# Altium PCB PCB1.PcbDoc (part 2 of 2)
Units mil, origin at the board's own origin, x right, y up, seen from the top; angles counter-clockwise.
Board outline 3937.01 x 3937.01 mil, 2 copper layers (Top Layer, Bottom Layer); 147 components, 119 nets, 531 pads, 24 vias.
Unrouted connection lines stored in the file: 277.
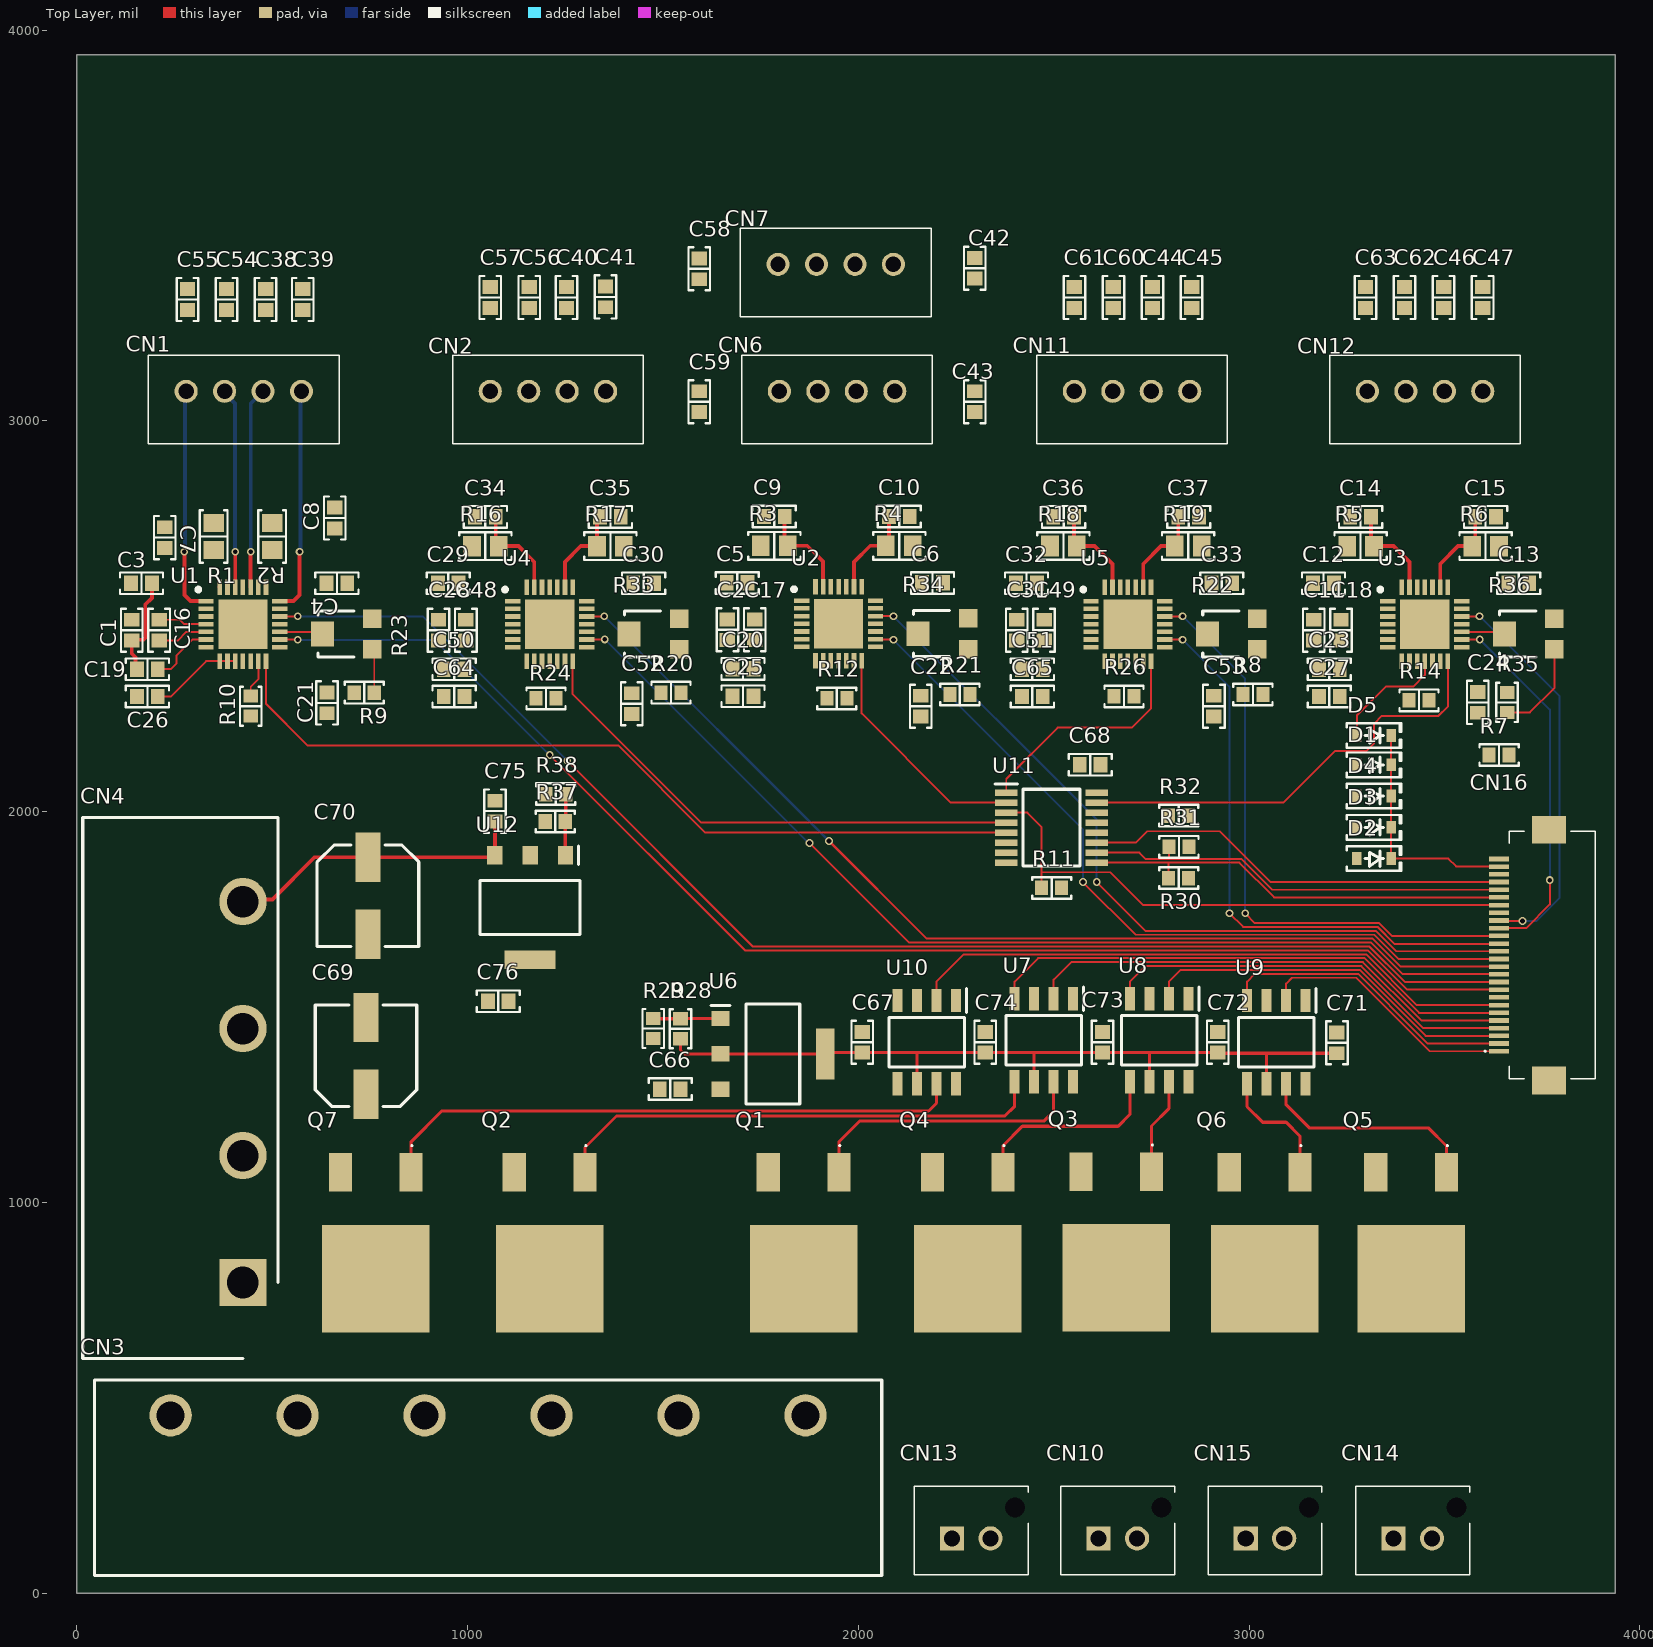
[diagram p0: Top Layer view]

## Via types
v1: diameter 19.68, hole 11.81, Top Layer to Bottom Layer, 24 vias

## Nets (pads, with @x,y where several pads share a name; then routed paths per layer and width w, separated by ;. In a path a pad name is that pad's centre, name@x,y a point inside that pad or via, vN(x,y) a via of type N, cw(c..) or ccw(c..) an arc to the next point about the centre after c; other vN are vias at no path point) (continued)
NetD5_1: (continued)
  Top Layer w5: D5.1 3276.2,2246.2 3350,2320 3420,2320 3450,2350 U3.11
NetR8_2: R8.2 R22.1
NetR9_2: R9.2 R23.1 | length 112.6
  Top Layer w5: R23.1 761.1,2410.59 R9.2
NetR10_2: R10.2 U1.13 | length 98.8
  Top Layer w5: R10.2 445,2320 464.37,2339.37 U1.13 U1.13@465,2384.88
NetR12_2: R12.2 U2.13
NetR14_2: R14.2 U3.13
NetR20_2: R20.2 R33.1
NetR21_2: R21.2 R34.1
NetR22_2: R22.2 U5.17
NetR23_2: R23.2 U1.17 | length 111.3
  Top Layer w5: U1.17 622.8,2460.32 R23.2
NetR24_2: R24.2 U4.13
NetR26_2: R26.2 U5.13
NetR28_1: R28.1 R29.2 U6.1 | length 172.8
  Top Layer w5: R29.2 R29.2@1475.59,1470 ; R28.1 R28.1@1545.55,1470.55
  Top Layer w8: R29.2@1475.59,1470 R28.1 ; R28.1@1545.55,1470.55 U6.1
NetR33_2: R33.2 U4.17
NetR34_2: R34.2 U2.17
NetR35_2: R35.2 R36.1 | length 245.6
  Top Layer w5: R35.2 3719.09,2254.09 3781.38,2316.38 R36.1
NetR36_2: R36.2 U3.17 | length 111.3
  Top Layer w5: U3.17 3647.8,2460.32 R36.2
NetR37_1: R37.1 R38.2 U12.1 | length 156.9
  Top Layer w8: U12.1 1250,1889.41 R37.1 1251.18,1976.18 R38.2
NZLFG: Q5.1 U9.7 | length 575.3
  Top Layer w8: U9.7 3095,1250 3155,1190 3460,1190 3505.55,1144.45 Q5.1
OA1: C38.2 CN1.2 U1.24 | length 514.7
  Top Layer w10: U1.24 444.68,2664.68 v1(445,2665)
  Bottom Layer w10: v1(445,2665) 445,3044.57 CN1.2
OA2: C39.2 CN1.1 U1.21 | length 580.1
  Top Layer w10: U1.21 554.06,2539.06 570,2555 v1(570,2665)
  Bottom Layer w10: v1(570,2665) 571.85,2666.85 571.85,3073 CN1.1
OA3: C40.2 CN2.2 U4.24
OA4: C41.2 CN2.1 U4.21
OA5: C42.2 CN6.2 CN7.2 U2.24
OA6: C43.2 CN6.1 CN7.1 U2.21
OA7: C44.2 CN11.2 U5.24
OA8: C45.2 CN11.1 U5.21
OA9: C46.2 CN12.2 U3.24
OA10: C47.2 CN12.1 U3.21
OB1: C54.2 CN1.3 U1.26 | length 510.8
  Top Layer w10: v1(405,2665) 405.32,2664.68 U1.26
  Bottom Layer w10: CN1.3@383,3076 383,3067 405,3045 v1(405,2665)
OB2: C55.2 CN1.4 U1.1 | length 585.3
  Top Layer w10: v1(275,2665) 275,2554.56 290.5,2539.06 U1.1
  Bottom Layer w10: v1(275,2665) 276.85,2666.85 276.85,3073.28 CN1.4
OB3: C56.2 CN2.3 U4.26
OB4: C57.2 CN2.4 U4.1
OB5: C58.2 CN6.3 CN7.3 U2.26
OB6: C59.2 CN6.4 CN7.4 U2.1
OB7: C60.2 CN11.3 U5.26
OB8: C61.2 CN11.4 U5.1
OB9: C62.2 CN12.3 U3.26
OB10: C63.2 CN12.4 U3.1
STEP1: CN16.9 U1.16 | length 3491.8
  Top Layer w5: U1.16 519.8,2440.31 564.69,2440.31 v1(565,2440) ; v1(1210,2145) 1710,1645 3303.99,1645 3404.62,1544.37 CN16.9
  Bottom Layer w5: v1(565,2440) 915,2440 v1(1210,2145)
STEP2: CN16.11 U4.16 | length 2690.7
  Top Layer w5: U4.16 1350.81,2440.63 v1(1351.09,2440.91) ; v1(1875,1920) 2130,1665 3312.28,1665 3392.91,1584.37 3639.37,1584.37 CN16.11
  Bottom Layer w5: v1(1351.09,2440.91) 1872.01,1920 v1(1875,1920)
STEP3: CN16.13 U2.16 | length 2014.1
  Top Layer w5: U2.16 2044.74,2440.77 2089.23,2440.77 v1(2090,2440) ; v1(2575,1820) 2710,1685 3320.56,1685 3382.45,1623.11 CN16.13
  Bottom Layer w5: v1(2090,2440) 2575,1955 v1(2575,1820)
STEP4: CN16.15 U5.16 | length 1518
  Top Layer w5: U5.16 2784.8,2440.31 2829.69,2440.31 v1(2830,2440) ; v1(2950,1740) 2985,1705 3328.85,1705 3371.92,1661.92 3639.44,1661.92 CN16.15
  Bottom Layer w5: v1(2830,2440) 2950,2320 v1(2950,1740)
STEP5: CN16.17 U3.16 | length 953.7
  Top Layer w5: U3.16 3590.47,2440.63 v1(3590.56,2440.72) ; CN16.17 3684.96,1701.85 3709.16,1701.85 3770,1762.69 v1(3770,1825)
  Bottom Layer w5: v1(3590.56,2440.72) 3770,2261.28 v1(3770,1825)
UART: CN16.20 R11.1 U11.3 | length 1467
  Top Layer w5: U11.3 2432.64,1997.36 2469.41,1960.59 2469.41,1845 ; R11.1 2469.41,1845 ; CN16.20 2729.09,1760.91 2645,1845 2469.41,1845
UART1: U1.14 U11.5 | length 2140.8
  Top Layer w5: U1.14 484.06,2275.94 590,2170 1385,2170 1608.82,1946.18 U11.5
UART2: U4.14 U11.4 | length 1330.5
  Top Layer w5: U4.14 1269.06,2300.94 1598.23,1971.77 U11.4
UART3: U2.14 U11.2 | length 599.7
  Top Layer w5: U2.14 2008.54,2251.46 2237.05,2022.95 U11.2
UART4: U5.14 U11.1 | length 601.7
  Top Layer w5: U11.1 2378.66,2083.66 2510,2215 2700,2215 2749.06,2264.06 U5.14
UART5: U3.14 U11.15 | length 1146.7
  Top Layer w5: U11.15 3087.95,2022.95 3220,2155 3300,2155 3320,2175 3320,2225 3340,2245 3485,2245 3509.06,2269.06 U3.14
pads on no net: CN10.MH1 CN13.MH1 CN14.MH1 CN15.MH1 U1.7 U1.12 U1.20 U1.25 U2.7 U2.12 U2.20 U2.25 U3.7 U3.12 U3.20 U3.25 U4.7 U4.12 U4.20 U4.25 U5.7 U5.12 U5.20 U5.25 U7.1 U7.8 U8.1 U8.8 U9.1 U9.8 U10.1 U10.4 U10.5 U10.8 U11.7 U11.12 U11.13 U11.14

## Silkscreen, mask and mechanical layers (free items; w line width, h text height)
Bottom Overlay:
  text "Łukasz Weber 2023" at 3880,3715 h60
Mechanical 13:
  the board outline again, w10